# Altium PCB pc2micro.PcbDoc
Units mm, origin at the board's own origin, x right, y up, seen from the top; angles counter-clockwise.
Board outline 48.26 x 88.27 mm, 2 copper layers (Top Layer, Bottom Layer); 34 components, 26 nets, 130 pads, 3 vias.
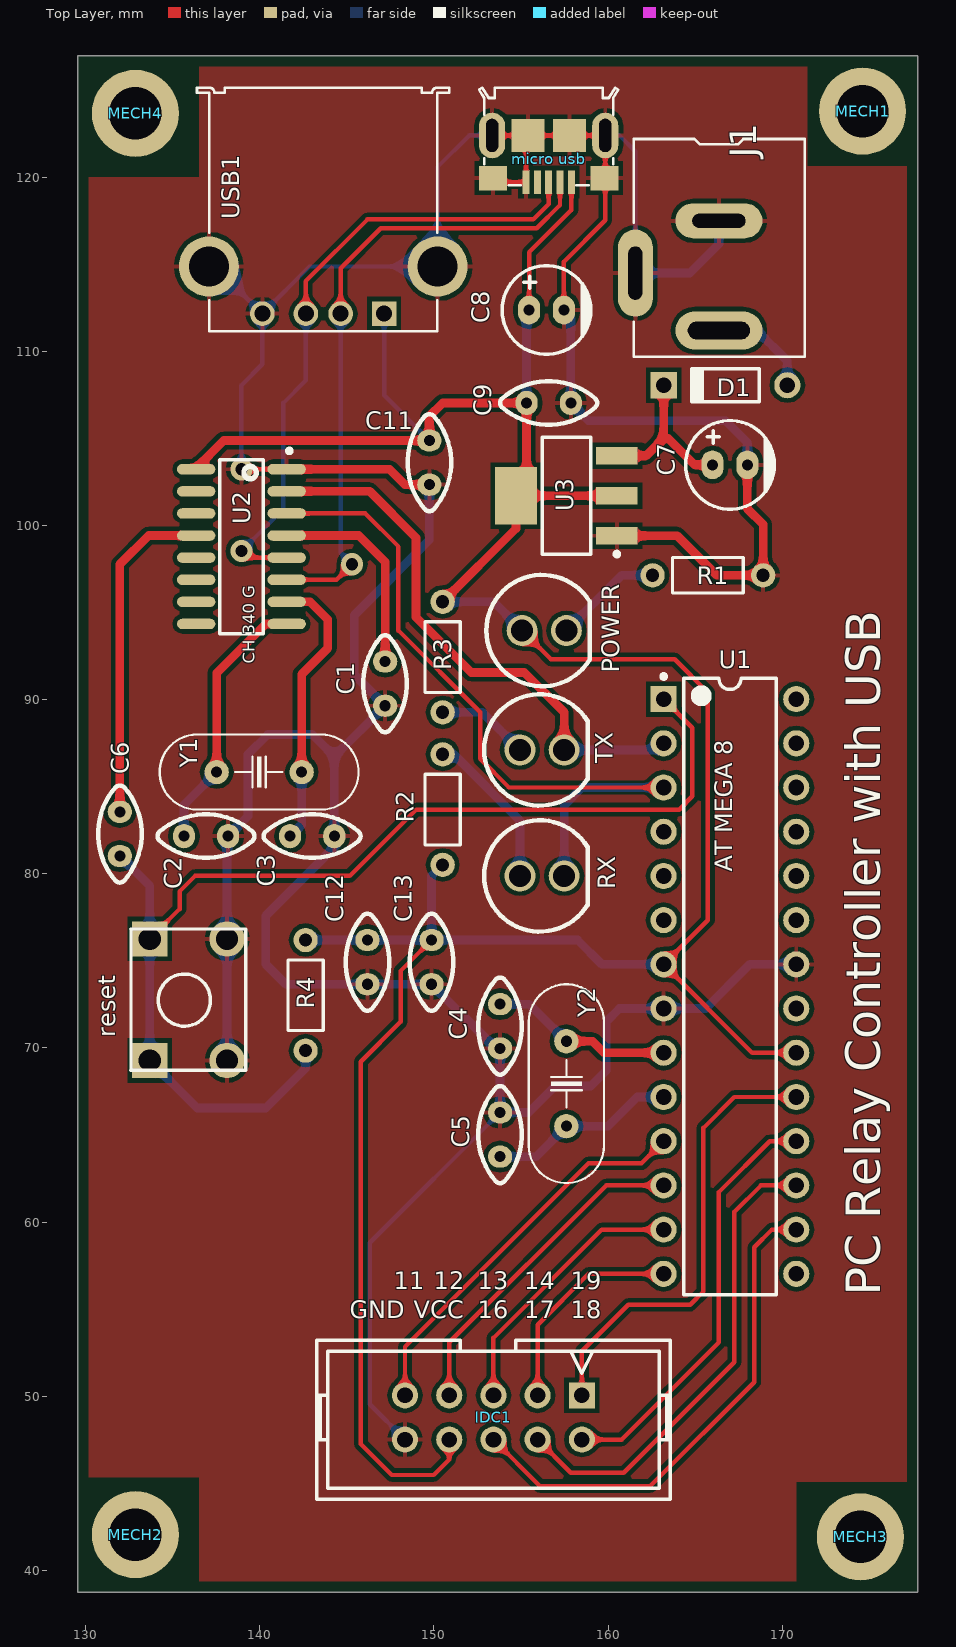
[diagram p0: Top Layer view]
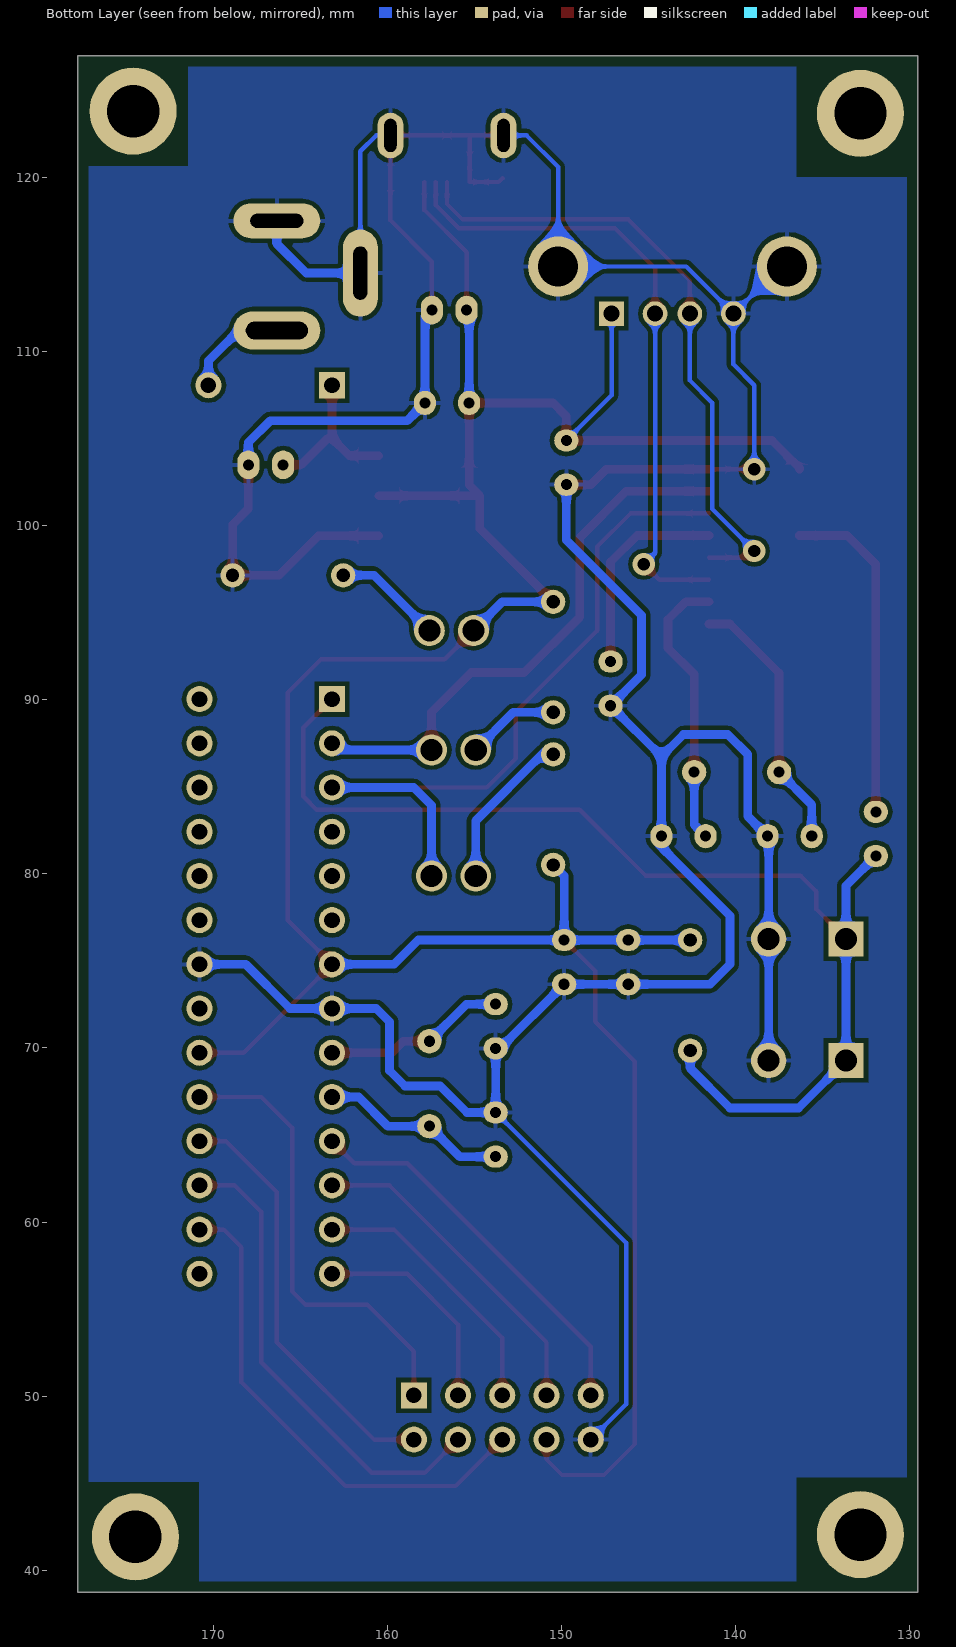
[diagram p1: Bottom Layer view, seen from below]
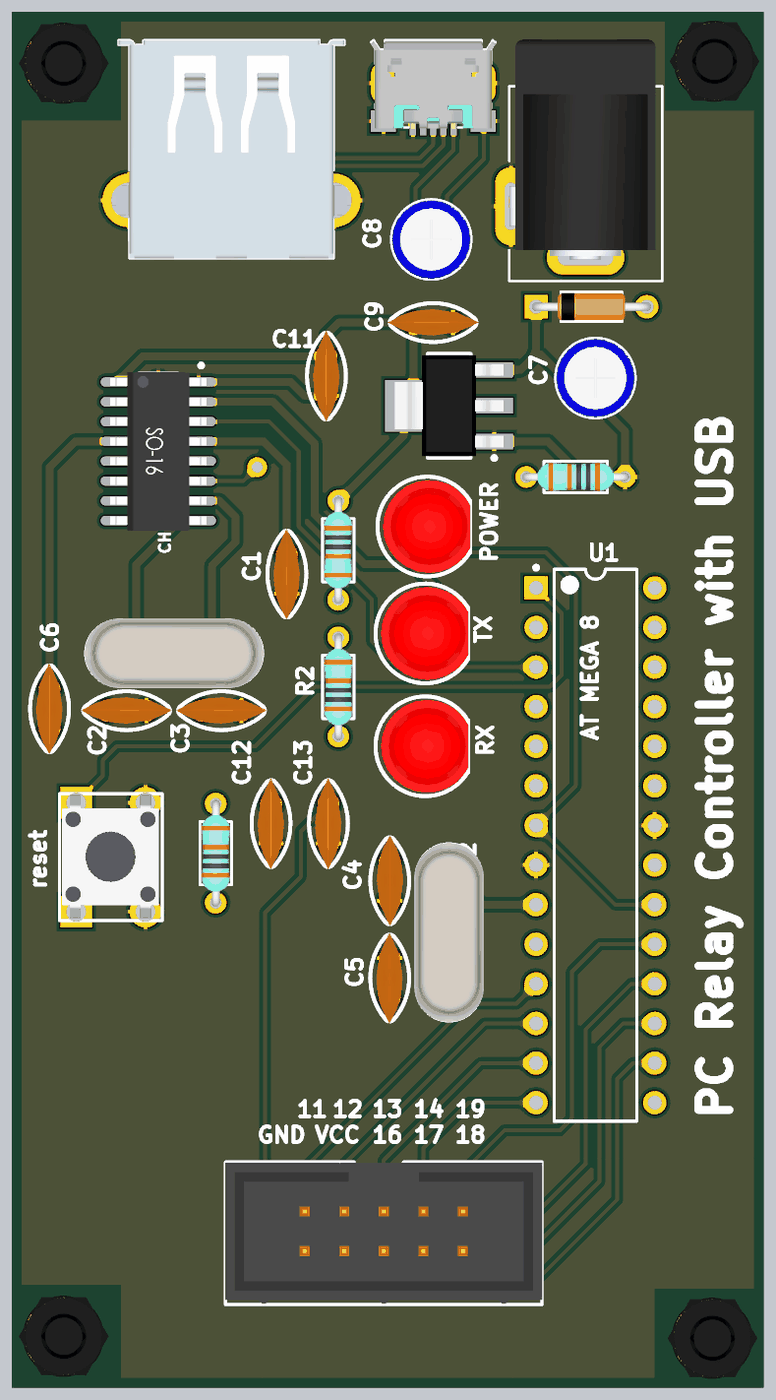
[diagram p2: 3D render of the assembled board from above, using the file's embedded part models]

## Layer stack, top to bottom
Top Solder: solder mask 0.0102, Solder Resist, Dk 3.5
Top Layer: signal copper 0.0356
Dielectric 1: dielectric 0.32, FR-4, Dk 4.8
Bottom Layer: signal copper 0.0356
Bottom Solder: solder mask 0.0102, Solder Resist, Dk 3.5

## Board outline
129.54,38.735 129.54,127 177.8,127 177.8,38.735

## Design rules (kind name [scope] priority, off if disabled: settings)
Clearance [All] p1: gap=0.25
PolygonConnect [All] p1: connectstyle=Relief reliefconductorwidth=0.254 reliefentries=4 polygonreliefangle="90 Angle" airgapwidth=0.254
RoutingVias [All] p1: holewidth=0.711 width=1.27 viastyle="Through Hole" minholewidth=0.711 minwidth=1.27 maxholewidth=0.711 maxwidth=1.27
SolderMaskExpansion [All] p1: expansion=0.102
UnpouredPolygon [All] p1: allowunpoured=FALSE
Width [All] p1: maxlimit=1 minlimit=0.254 preferedwidth=0.5
29 further rules are at their usual default settings.

## Components (designator, comment, footprint, x,y, rotation, side; value= is the part's Value field where it differs from the comment)
C1 "1000n" "Cap - 100nF" 147.193,90.932 r270 top
C2 "22p" "Cap - 100nF" 136.906,82.169 r180 top
C3 "22p" "Cap - 100nF" 143.002,82.169 r180 top
C4 "22p" "Cap - 100nF" 153.797,71.247 r90 top
C5 "22p" "Cap - 100nF" 153.797,65.024 r270 top
C6 "1000n" "Cap - 100nF" 131.953,82.296 r270 top
C7 "100u" "cap 01" 167.005,103.505 r180 top
C8 "10u" "cap 01" 156.464,112.395 r180 top
C9 "10n" "Cap - 100nF" 156.591,107.061 r180 top
C11 "100nF" "Cap - 100nF" 149.733,103.632 r270 top
C12 "100nF" "Cap - 100nF" 146.177,74.93 r270 top
C13 "100nF" "Cap - 100nF" 149.86,74.93 r270 top
D1 "1N4148" DO-35 166.751,108.077 r180 top
IDC1 "DC3-10" DC3-2.54-10 158.496,50.038 r180 top
J1 "CONN_PWR_JACK_2.1x5.5mm" CONN_PWR_JACK_v2 166.37,125.222 r0 top
MECH1 "# pcs." PCB_standoff 174.625,123.825 r0 top
MECH2 "# pcs." PCB_standoff 132.842,42.037 r0 top
MECH3 "# pcs." PCB_standoff 174.498,41.91 r0 top
MECH4 "# pcs." PCB_standoff 132.842,123.698 r0 top
"micro usb" "Micro/Mini USB 2.0 Type *" Micro_USB2_0_B_SMT_DIP2_1 156.591,122.428 r180 top
POWER "SMD LED" "LED 5mm" 156.337,93.98 r270 top
R1 "1K" Res-(1/4) 165.735,97.155 r180 top
R2 "1K" Res-(1/4) 150.495,83.693 r90 top
R3 "1K" Res-(1/4) 150.495,92.456 r270 top
R4 "10K" Res-(1/4) 142.621,73.025 r90 top
reset "Switch PB" "Switch - Push to On" 135.89,72.771 r90 top
RX "SMD LED" "LED 5mm" 156.21,79.883 r270 top (schematic designator LED2)
TX "SMD LED" "LED 5mm" 156.21,87.122 r270 top (schematic designator LED3)
U1 "ATmega8-16PU" 28P3 167.005,73.533 r0 top
U2 "CH340G" SOP-16 138.938,98.806 r0 top
U3 "AMS1117-5" MP04A_N 157.607,101.727 r180 top
USB1 "USB 2.0 Type *" USB2_0_A_DIP 143.637,118.178 r180 top
Y1 "16MHz" "XTAL Small" 139.954,85.852 r180 top
Y2 "16MHz" "XTAL Small" 157.607,67.945 r270 top

## Footprints (in the part's own frame and the unit in brackets; to place one, negate y for a bottom-side part, rotate by r counter-clockwise, add the part's x,y. Pads: shape width x height; smd on the part's side, far side on the other; paste and mask are expansions set on the pad)
28P3 [mm] "28-Pin Plastic Dual In-Line Package (PDIP)"
  rect 1.5x1.5 hole 0.9: 1(-3.81,16.51)
  round 1.5 hole 0.9: 2(-3.81,13.97) 3(-3.81,11.43) 4(-3.81,8.89) 5(-3.81,6.35) 6(-3.81,3.81) 7(-3.81,1.27) 8(-3.81,-1.27) 9(-3.81,-3.81) 10(-3.81,-6.35) 11(-3.81,-8.89) 12(-3.81,-11.43) 13(-3.81,-13.97) 14(-3.81,-16.51) 15(3.81,-16.51) 16(3.81,-13.97) 17(3.81,-11.43) 18(3.81,-8.89) 19(3.81,-6.35) 20(3.81,-3.81) 21(3.81,-1.27) 22(3.81,1.27) 23(3.81,3.81) 24(3.81,6.35) 25(3.81,8.89) 26(3.81,11.43) 27(3.81,13.97) 28(3.81,16.51)
  silkscreen extent -3.93,-17.7 2.65,17.93, body extent -3.6,-17.65 3.6,17.65, height 4.58
"cap 01" [mm]
  oval 1.27x1.651 hole 0.635: 1(1,0) 2(-1,0)
  silkscreen extent -2.55,-2.55 2.55,2.55, body extent -2.53,-2.53 2.53,2.53, height 12.54
"Cap - 100nF" [mil]
  oval 50x55 hole 25: 1(-50,0) 2(50,0)
  silkscreen extent -110,-49 110,49, body extent -115,-34 115,33, height 272
CONN_PWR_JACK_v2 [mm]
  oval 5x2.2 hole 1 slot 3.56 at 0 deg: 1(0,-14)
  oval 5x2 hole 0.8 slot 3.05 at 0 deg: 2(0,-7.7)
  oval 2x5 hole 0.8 slot 3.05 at 90 deg: 3(-4.8,-10.7)
  silkscreen extent -4.9,-15.5 4.92,-3, body extent -4.9,-14.1 4.5,0, height 11
DC3-2.54-10 [mm] "简易牛角座, DIP, pitch 2.54, 10pins"
  rect 1.5x1.5 hole 0.9: 1(0,0)
  round 1.5 hole 0.9: 2(0,2.54) 3(2.54,0) 4(2.54,2.54) 5(5.08,0) 6(5.08,2.54) 7(7.62,0) 8(7.62,2.54) 9(10.16,0) 10(10.16,2.54)
  silkscreen extent -5.08,-3.18 15.24,5.97, body extent -5.1,-3.13 15.26,5.92, height 9.07
DO-35 [mm] "Diode, Axial; Body 3.8 x 1.9 mm (LxDia. max), Lead Dia. 0.53 mm (max)"
  round 1.5 hole 0.9: 1(-3.55,0)
  rect 1.5x1.5 hole 0.9: 2(3.55,0)
  silkscreen extent -1.95,-0.95 2.05,0.95, body extent -3.82,-0.87 3.82,0.87, height 1.89
"LED 5mm" [mil]
  round 70 hole 50: 1(0,-50) 2(0,50)
  silkscreen extent -126,-131 126,103, body extent -117,-117 117,104, height 320
Micro_USB2_0_B_SMT_DIP2_1 [mm] "Micro USB 2.0 Type B Horizontal SMT 2DIP"
  rect 0.4x1.35 smd: 1(-1.3,2.675) 2(-0.65,2.675) 3(0,2.675) 4(0.65,2.675) 5(1.3,2.675)
  rrect100% 1.5x2.62 hole 1.9 slot 0.7 at 0 deg: S(-3.25,0) S(3.25,0)
  rect 1.6x1.4 smd: S(-3.2,2.45) S(3.2,2.45)
  rect 1.9x1.9 smd: S(-1.2,0) S(1.2,0)
  silkscreen extent -4,-2.75 4,2.85, body extent -4.05,-2.7 4.05,2.93, height 2.85
MP04A_N [mm] "SOT223, 4-Leads, Body 6.5x3.5mm, Pitch 2.3mm, Lead Span 7mm, IPC Medium Density"
  rect 2.4x1 smd: 1(-2.9,2.3) 2(-2.9,0) 3(-2.9,-2.3)
  rect 2.4x3.3 smd: 4(2.9,0)
  silkscreen extent -3.03,-3.35 1.4,3.47, body extent -3.49,-3.24 3.49,3.24, height 1.64
PCB_standoff [mm]
  round 5 hole 3: MH1(0,0)
  body extent -2.86,-2.5 2.91,2.5, height 5.2
Res-(1/4) [mil]
  round 55 hole 30: 1(-125,0) 2(125,0)
  silkscreen extent -80,-40 80,40, body extent -135,-36 135,36, height 115
SOP-16 [mm]
  oval 2.2x0.6 smd: 1(2.6,4.445) 2(2.6,3.175) 3(2.6,1.905) 4(2.6,0.635) 5(2.6,-0.635) 6(2.6,-1.905) 7(2.6,-3.175) 8(2.6,-4.445) 9(-2.6,-4.445) 10(-2.6,-3.175) 11(-2.6,-1.905) 12(-2.6,-0.635) 13(-2.6,0.635) 14(-2.6,1.905) 15(-2.6,3.175) 16(-2.6,4.445)
  silkscreen extent -1.25,-5 2.88,5.62, body extent -3.1,-5.08 3.1,5.08, height 1.73
"Switch - Push to On" [mil]
  rect 80x80 hole 50: 1(-137.5,87.5) 1(137.5,87.5)
  round 80 hole 50: 2(-137.5,-87.5) 2(137.5,-87.5)
  silkscreen extent -160,-130 160,130, body extent -155,-121 157,123, height 205
USB2_0_A_DIP [mm] "USB 2.0 Type A Horizontal"
  rect 1.42x1.42 hole 0.92: 1(-3.5,5.99)
  round 1.42 hole 0.92: 2(-1,5.99) 3(1,5.99) 4(3.5,5.99)
  round 3.45 hole 2.3: S(-6.57,3.28) S(6.57,3.28)
  silkscreen extent -7.25,-7 7.25,7, body extent -8,-7 8,7, height 7.63
"XTAL Small" [mil]
  round 55 hole 25: 1(-96.06,0) 2(96.06,0)
  silkscreen extent -225,-85 225,85, body extent -226,-89 226,89, height 140

## Part data
C1 C2 C3 C4 C5 C6 C9 C11 C12 C13: library part Cap-Bipolar, "Bipolar Capacitor"
C7 C8: library part Cap-Polar, "Polar Capacitor"
D1: library part "Diode 1N4148", "High Conductance Fast Diode"
IDC1: "?????, 10pins"
J1: "Power Connector, THT, 2.1mm ID, 5.5mm OD"
MECH1 MECH2 MECH3 MECH4: library part "STANDOFF_M-F_THREADED_M3x8x10mm_HEX_5mm dia", "STANDOFF M/F MET 5MM HEX 10MM L"
"micro usb": library part USB2_0-Micro&Mini, "Micro and Mini USB 2.0 (Type A and Type A/B)"
POWER RX TX: library part "LED SMD"
R1 R2 R3 R4: library part Resistor, "Resistor"
reset: "Push Button Switch"
U1: "8-bit AVR Microcontroller, 4.5-5.5V, 16MHz, 8KB Flash, 512 Bytes EEPROM, 1KB SRAM, 28-pin PDIP, Industrial Grade (-40癈 to 85癈)"
U3: library part LM1117IMP-5.0, "x.x Volt, 800mA Low-Dropout Linear Regulator, 4-pin SOT-223"
USB1: library part USB2_0-A&B, "USB 2.0 Type A and Type B"
Y1 Y2: library part XTAL, "XTAL Crystal"

## Via types
v1: diameter 1.27, hole 0.711, Top Layer to Bottom Layer, 3 vias

## Nets (pads, with @x,y where several pads share a name; then routed paths per layer and width w, separated by ;. In a path a pad name is that pad's centre, name@x,y a point inside that pad or via, vN(x,y) a via of type N, cw(c..) or ccw(c..) an arc to the next point about the centre after c; other vN are vias at no path point)
D+: "micro usb.3" U2.5 USB1.3 | length 36.9
  Top Layer w0.254: v1(138.938,98.552) 139.319,98.171 U2.5 ; USB1.3 142.637,114.062 146.177,117.602 155.702,117.602 156.591,118.491 156.591,119.753
  Bottom Layer w0.254: v1(138.938,98.552) 141.351,100.965 141.351,107.061 142.637,108.347 USB1.3
D-: "micro usb.2" U2.6 USB1.2 | length 36.8
  Top Layer w0.254: U2.6 144.399,96.901 v1(145.288,97.79) ; USB1.2 144.637,114.792 146.939,117.094 148.332,117.094 148.336,117.098 155.911,117.098 157.241,118.428 157.241,119.753
  Bottom Layer w0.254: USB1.2 144.637,98.441 v1(145.288,97.79)
DTR: C6.1 U2.13 | length 19.3
  Top Layer w0.5: C6.1 131.953,97.79 133.604,99.441 U2.13
GND: "micro usb.5" "micro usb.S" C1.2 C2.1 C3.1 C4.1 C5.1 C7.2 C8.2 C9.1 C11.2 C12.2 C13.2 IDC1.10 J1.2 J1.3 R1.1 reset.2 U1.8 U1.22 U2.1 U3.1 USB1.4 USB1.S | length 238.7
  Top Layer w0.254: v1(138.938,103.251) U2.1 ; 153.341,122.428 155.391,122.428 ; 153.391,119.978 153.616,119.753 155.291,119.753 155.291,122.328 155.391,122.428 ; C8.2 157.464,115.173 159.841,117.55 159.841,122.428 157.791,122.428 155.391,122.428
  Top Layer w0.5: U2.1 147.447,103.251 148.336,102.362 C11.2 ; U3.1 163.971,99.427 166.243,97.155 R1.1 168.91,100.076 168.005,100.981 C7.2
  Bottom Layer w0.254: USB1.S@137.067,114.898 137.427,114.898 USB1.4 ; v1(138.938,103.251) 138.938,108.077 140.137,109.276 USB1.4 ; IDC1.10 146.304,49.53 146.304,58.801 C5.1 ; 153.341,122.428 152.019,122.428 150.207,120.616 150.207,114.898 142.847,114.898 USB1.4 ; 159.841,122.428 160.655,122.428 161.57,121.513 J1.3
  Bottom Layer w0.5: reset.2@138.112,69.278 138.112,76.263 138.112,82.105 C2.1 139.319,83.312 139.319,86.868 140.462,88.011 143.002,88.011 144.272,86.741 ; C11.2 149.733,99.187 145.415,94.869 145.415,91.44 C1.2 144.272,86.741 ; C8.2 157.861,111.998 C9.1 158.877,106.045 166.751,106.045 168.005,104.791 C7.2 ; J1.3 164.687,114.522 166.37,116.205 J1.2 ; U1.22 168.148,74.803 165.608,72.263 U1.8 160.655,72.263 159.893,71.501 159.893,68.707 159.004,67.818 156.972,67.818 155.448,66.294 C5.1 C4.1 153.543,69.977 C13.2 C12.2 141.478,73.66 140.335,74.803 140.335,77.597 144.272,81.534 C3.1 144.272,86.741
NetC1_1: C1.1 U2.4 | length 12
  Top Layer w0.5: U2.4 145.669,99.441 147.193,97.917 C1.1
NetC7_1: C7.1 D1.2 U3.3 | length 9.6
  Top Layer w0.5: U3.3 162.193,104.027 163.201,105.035 ; D1.2 163.201,105.035 ; C7.1 164.973,103.505 163.443,105.035 163.201,105.035
NetD1_1: D1.1 J1.1 | length 6.1
  Bottom Layer w0.5: J1.1 168.559,111.222 170.301,109.48 D1.1
NetPOWER_2: POWER.2 R1.2 | length 6.3
  Bottom Layer w0.5: POWER.2 160.782,97.155 R1.2
NetR2_2: R2.2 RX.1 | length 9.2
  Bottom Layer w0.5: R2.2 151.13,86.868 154.94,83.058 RX.1
NetR3_2: R3.2 TX.1 | length 5.3
  Bottom Layer w0.5: R3.2 152.781,89.281 TX.1
RELAY1: IDC1.9 U1.11 | length 22.5
  Top Layer w0.254: IDC1.9 148.336,52.832 158.877,63.373 161.925,63.373 U1.11
RELAY2: IDC1.7 U1.12 | length 19.1
  Top Layer w0.254: IDC1.7 150.876,53.086 159.893,62.103 U1.12
RELAY3: IDC1.5 U1.13 | length 15.7
  Top Layer w0.254: IDC1.5 153.416,53.34 159.639,59.563 U1.13
RELAY4: IDC1.3 U1.14 | length 12.5
  Top Layer w0.254: IDC1.3 155.956,54.102 158.877,57.023 U1.14
RELAY5: IDC1.1 U1.19 | length 26.4
  Top Layer w0.254: IDC1.1 158.496,52.578 161.163,55.245 164.719,55.245 165.481,56.007 165.481,65.405 167.259,67.183 U1.19
RELAY6: IDC1.2 U1.18 | length 24.5
  Top Layer w0.254: IDC1.2 160.782,47.498 166.37,53.086 166.37,61.722 169.291,64.643 U1.18
RELAY7: IDC1.4 U1.17 | length 27.5
  Top Layer w0.254: IDC1.4 157.861,45.593 160.909,45.593 167.259,51.943 167.259,60.579 168.783,62.103 U1.17
RELAY8: IDC1.6 U1.16 | length 29.1
  Top Layer w0.254: IDC1.6 156.083,44.831 162.433,44.831 168.402,50.8 168.402,58.547 169.418,59.563 U1.16
RESET: C6.2 R4.1 reset.1 U1.1 | length 65.9
  Top Layer w0.254: reset.1@133.667,76.263 135.382,77.978 135.382,78.994 136.271,79.883 145.161,79.883 148.971,83.693 164.084,83.693 164.846,84.455 164.846,88.392 U1.1
  Bottom Layer w0.5: C6.2 133.667,79.311 133.667,76.263 133.667,69.278 136.398,66.548 140.335,66.548 142.621,68.834 R4.1
RXD: RX.2 U1.3 U2.3 | length 42.8
  Top Layer w0.254: U2.3 146.05,100.711 147.955,98.806 147.955,93.98 152.654,89.281 152.654,86.614 154.305,84.963 U1.3
  Bottom Layer w0.5: RX.2 157.48,83.947 158.496,84.963 U1.3
TXD: TX.2 U1.2 U2.2 | length 31.9
  Top Layer w0.5: U2.2 146.304,101.981 148.971,99.314 148.971,94.742 152.146,91.567 155.194,91.567 157.48,89.281 TX.2
  Bottom Layer w0.5: TX.2 162.814,87.122 U1.2
VCC: "micro usb.1" C8.1 C9.2 C11.1 C12.1 C13.1 IDC1.8 POWER.1 R2.1 R3.1 R4.2 U1.7 U1.20 U2.16 U3.2 U3.4 USB1.1 | length 170.3
  Top Layer w0.254: C13.1 148.082,74.422 148.082,71.501 145.796,69.215 145.796,47.244 147.574,45.466 149.987,45.466 150.876,46.355 IDC1.8 ; POWER.1 156.718,92.329 163.83,92.329 165.735,90.424 165.735,77.343 U1.7 168.275,69.723 U1.20 ; C8.1 155.464,115.713 157.891,118.14 157.891,119.753
  Top Layer w0.5: U2.16 136.338,103.318 137.922,104.902 C11.1 149.733,106.299 150.495,107.061 C9.2 155.321,102.341 U3.4 ; R3.1 154.707,99.843 U3.4 ; U3.2 U3.4
  Bottom Layer w0.254: USB1.1 147.137,107.498 C11.1
  Bottom Layer w0.5: R4.2 C12.1 C13.1 ; R2.1 149.86,79.883 C13.1 ; R3.1 153.416,95.631 POWER.1 ; C9.2 155.321,112.252 C8.1 ; U1.7 159.639,74.803 158.242,76.2 C13.1
XI: C3.2 U2.7 Y1.1 | length 16.1
  Top Layer w0.5: U2.7 142.875,95.631 143.891,94.615 143.891,92.964 142.394,91.467 Y1.1
  Bottom Layer w0.5: C3.2 142.394,82.831 Y1.1
XO: C2.2 U2.8 Y1.2 | length 15.3
  Top Layer w0.5: Y1.2 137.514,91.54 140.335,94.361 U2.8
  Bottom Layer w0.5: C2.2 135.636,83.974 Y1.2
XTAL1: C4.2 U1.9 Y2.1 | length 10.6
  Top Layer w0.5: Y2.1 159.104,70.385 159.766,69.723 U1.9
  Bottom Layer w0.5: C4.2 155.475,72.517 Y2.1
XTAL2: C5.2 U1.10 Y2.2 | length 10.8
  Bottom Layer w0.5: C5.2 155.856,63.754 Y2.2 159.993,65.505 161.671,67.183 U1.10
pads on no net: "micro usb.4" MECH1.MH1 MECH2.MH1 MECH3.MH1 MECH4.MH1 U1.4 U1.5 U1.6 U1.15 U1.21 U1.23 U1.24 U1.25 U1.26 U1.27 U1.28 U2.9 U2.10 U2.11 U2.12 U2.14 U2.15

## Polygon pours and split planes (outlines as drawn)
GND on Bottom Layer "Bottom Layer-No Net" (solid, pour order 2): 130.175,120.015 136.525,120.015 136.525,126.365 136.779,126.365 171.45,126.365 171.45,125.73 171.45,120.65 177.165,120.65 177.165,45.085 176.53,45.085 170.815,45.085 170.815,44.45 170.815,39.37 170.18,39.37 136.525,39.37 136.525,45.085 136.525,45.339 130.175,45.339 130.175,45.72 130.175,120.015
GND on Top Layer "Bottom Layer-No Net" (solid, pour order 6): 130.175,120.015 136.525,120.015 136.525,126.365 171.45,126.365 171.45,120.65 177.165,120.65 177.165,45.085 170.815,45.085 170.815,39.37 136.525,39.37 136.525,45.339 130.175,45.339 130.175,120.015

## Silkscreen, mask and mechanical layers (free items; w line width, h text height)
Top Overlay:
  text "CH 340 G" at 139.7,92.075 h0.7 r90
  text "AT MEGA 8" at 167.132,80.137 h1 r90
  text "11" at 147.701,56.134 h1
  text "12" at 149.987,56.134 h1
  text "13" at 152.527,56.134 h1
  text "14" at 155.194,56.134 h1
  text "19" at 157.861,56.134 h1
  text "PC Relay Controller with USB" at 175.641,55.753 h2 r90
  text "GND" at 145.161,54.483 h1
  text "VCC" at 148.844,54.483 h1
  text "16" at 152.527,54.483 h1
  text "17" at 155.194,54.483 h1
  text "18" at 157.861,54.483 h1
Mechanical 1:
  lines w0.254: 129.54,38.735 139.319,38.735 169.037,38.735 177.8,38.735 177.8,127 129.54,127 129.54,67.31 129.54,38.735

## Text inside footprints (layer, text, board x,y; h text height)
"micro usb": Mechanical 1 "PCB Edge" at 157.991,124.528 h0.76 r180